# Altium PCB PCB1.PcbDoc
Units mil, origin at the board's own origin, x right, y up, seen from the top; angles counter-clockwise.
Board outline 3020 x 2840 mil, 2 copper layers (Top Layer, Bottom Layer); 55 components, 38 nets, 145 pads, 15 vias.
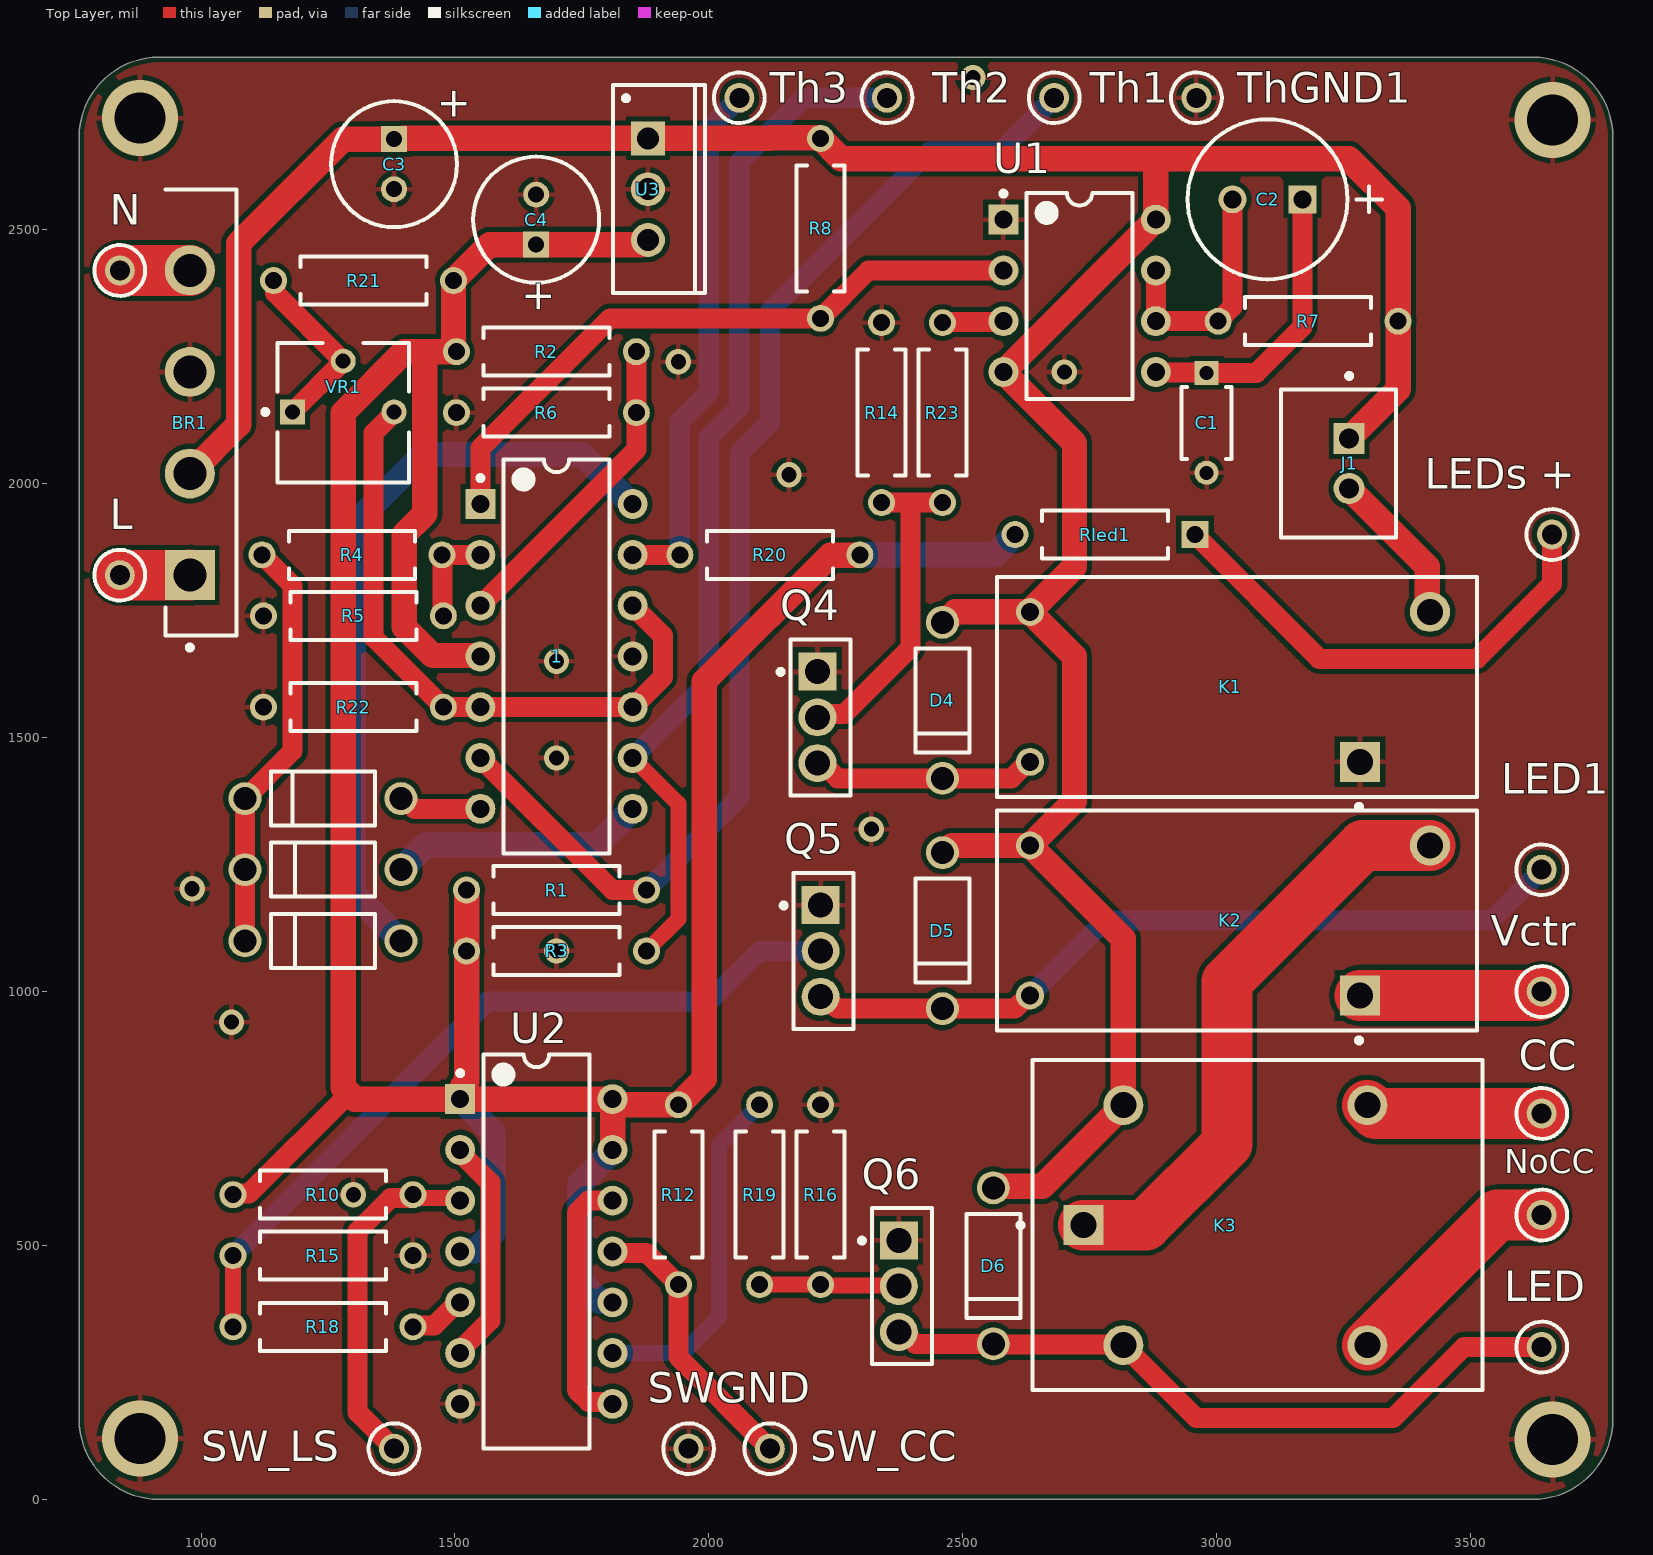
[diagram p0: Top Layer view]
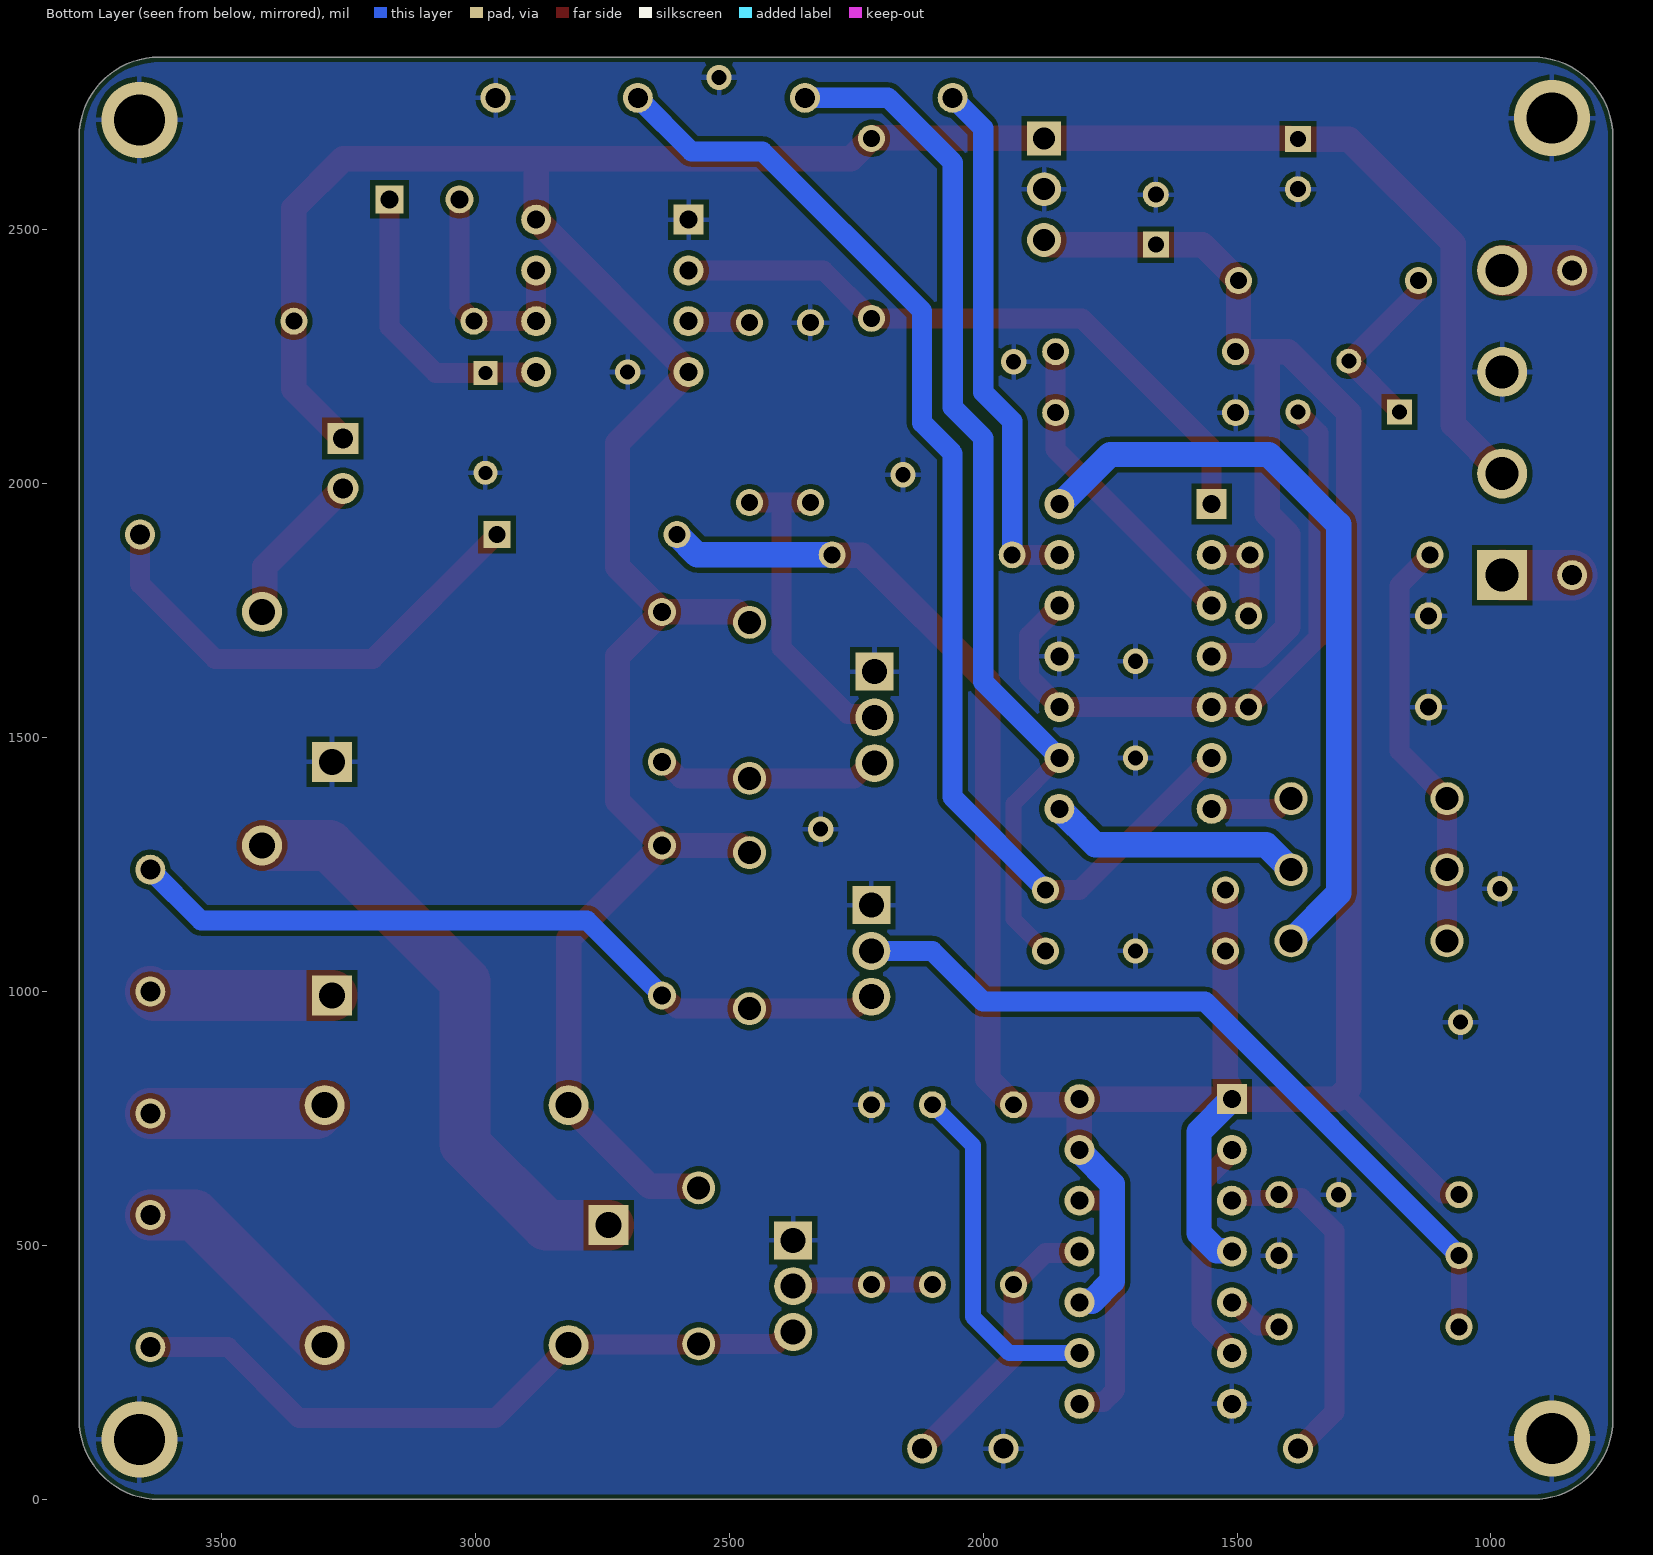
[diagram p1: Bottom Layer view, seen from below]

## Layer stack, top to bottom
Top Solder: solder mask 0.4, Solder Resist, Dk 3.5
Top Layer: signal copper 1.4
Dielectric 1: dielectric 12.6, FR-4, Dk 4.8
Bottom Layer: signal copper 1.4
Bottom Solder: solder mask 0.4, Solder Resist, Dk 3.5

## Board outline
760,157.48 760,2682.52 cw(c917.48,2682.52) 917.48,2840 3622.52,2840 cw(c3622.52,2682.52) 3780,2682.52 3780,157.48 cw(c3622.52,157.48) 3622.52,0 917.48,0 cw(c917.48,157.48)

## Design rules (kind name [scope] priority, off if disabled: settings)
BoardOutlineClearance [All] p1: gap=10 ignorepadtopadclearanceinfootprint=FALSE except(0: Arc-SplitContinuation Track-SplitContinuation SMDPad-SplitContinuation THPad-SplitContinuation Via-SplitContinuation Fill-SplitContinuation Poly-SplitContinuation Region-SplitContinuation Text-SplitContinuation)
Clearance [All] p1: gap=10 ignorepadtopadclearanceinfootprint=TRUE
MinimumSolderMaskSliver [All] p1: minsoldermaskwidth=7.87
PolygonConnect [All] p1: connectstyle=Relief reliefconductorwidth=10 reliefentries=4 polygonreliefangle="90 Angle" airgapwidth=10
RoutingVias [All] p1: holewidth=28 width=50 viastyle="Through Hole" minholewidth=28 minwidth=50 maxholewidth=28 maxwidth=50
SolderMaskExpansion [All] p1: expansion=0 istentingtop=FALSE
SupplyNets "Schematic Supply Nets_3" [InNet('+9~')] p1: voltage=0.000
SupplyNets "Schematic Supply Nets_1" [InNet('GND')] p2: voltage=0.000
SupplyNets "Schematic Supply Nets" [InNet('+5')] p3: voltage=0.000
Width Width_1 [All] p1: maxlimit=196.85 minlimit=5.91 preferedwidth=10 minimp=50.000000 maximp=50.000000 favimp=50.000000
Width [All] p2: maxlimit=10 minlimit=10 preferedwidth=10
29 further rules are at their usual default settings.

## Classes and differential pairs
component class U_Relays: CC D4 D5 D6 J1 K1 K2 K3 LED LED1 "LEDs +" NoCC Q4 Q5 Q6 R14 R15 R16 R18 R19 R23 Rled1 Vctr
component class U_Relay_Latches: R10 R12 SW_CC SW_LS SWGND U2
component class U_Power: BR1 C3 C4 L N U3
component class U_Fan_Control: 1 C1 C2 R1 R2 R3 R4 R5 R6 R7 R8 R20 R21 R22 Th1 Th2 Th3 ThGND1 U1 VR1

## Components (designator, comment, footprint, x,y, rotation, side; value= is the part's Value field where it differs from the comment)
1 "LM324AN" TI-N0014A 1700,1660 r0 top
BR1 "GBU8D" FP-127EL-MFG 1000,2140 r270 top
C1 "RCER71H103K0K1H03B" FP-RCE0K1-MFG 2980,2120 r270 top
C2 "ECA1HM101" CAPPR65-350-1150X800X1250 3100,2560 r180 top value=470µF
C3 "ECA-2AM220" CAPPR55-250-1120X630X1220 1380,2629.21 r270 top value=100µF
C4 "ECA-2AM220" CAPPR55-250-1120X630X1220 1660,2520 r90 top value=100µF
CC "5003" KSTN-5003 3640,760 r0 top
D4 "1N4007" FAIR-DO-41-2 2460,1573.54 r270 top
D5 "1N4007" FAIR-DO-41-2 2460,1120 r270 top
D6 "1N4007" FAIR-DO-41-2 2560,460 r270 top
J1 "Fan" FP-B2B-XH-A_LF_SN-MFG 3240,2040 r270 top
K1 "LKQ1AF-5V-TV-5" FP-LKQ1AF-5V-TV-5-MFG 3040,1600 r180 top
K2 "Load Switch" FP-LKQ1AF-5V-TV-5-MFG 3040,1140 r180 top
K3 "G5LE-14-36 DC12" FP-G5LE-14-36_DC12-MFG 3080,540 r0 top
L "5003" KSTN-5003 840,1820 r90 top
LED "5003" KSTN-5003 3640,300 r180 top
LED1 "5003" KSTN-5003 3640,1240 r90 top
"LEDs +" "5003" KSTN-5003 3660,1900 r90 top
N "5003" KSTN-5003 840,2420 r90 top
NoCC "5003" KSTN-5003 3640,560 r90 top
Q4 "BD139G" FP-77-09-MFG 2220,1540 r0 top
Q5 "BD139G" FP-77-09-MFG 2226.1,1080 r0 top
Q6 "BD139G" FP-77-09-MFG 2380,420 r0 top
R1 "MFR-25FBF52-100R" RESA60-630X240#1 1700,1200 r0 top value=47k
R2 "MFR-25FBF52-100R" RESA60-630X240#1 1680,2260 r0 top value=50k
R3 "MFR-25FBF52-100R" RESA60-630X240#1 1700,1080 r0 top value=47k
R4 "MFR-25FBF52-100R" RESA60-630X240#1 1297.17,1860 r180 top value=1k
R5 "MFR-25FBF52-100R" RESA60-630X240#1 1300,1740 r180 top value=20k
R6 "MFR-25FBF52-100R" RESA60-630X240#1 1680,2140 r180 top value=20k
R7 "MFR-25FBF52-1K" RESA60-630X240#1 3180,2320 r0 top value=20k
R8 "MFR-25FBF52-1K" RESA60-630X240#1 2220,2502.83 r270 top value=10k
R10 "MFR-25FBF52-100R" RESA60-630X240#1 1240,600 r180 top value=4k7
R12 "MFR-25FBF52-100R" RESA60-630X240#1 1940,600 r90 top value=4k7
R14 "MFR-25FBF52-100R" RESA60-630X240#1 2340,2140 r270 top value=4k7
R15 "MFR-25FBF52-100R" RESA60-630X240#1 1240,480 r180 top value=4k7
R16 "MFR-25FBF52-100R" RESA60-630X240#1 2220,600 r270 top value=4k7
R18 "MFR-25FBF52-100R" RESA60-630X240#1 1240,340 r0 top value=330R
R19 "MFR-25FBF52-100R" RESA60-630X240#1 2100,600 r90 top value=330R
R20 "MFR-25FBF52-100R" RESA60-630X240#1 2120,1860 r180 top value=47k
R21 "MFR-25FBF52-100R" RESA60-630X240#1 1320,2400 r180 top value=4k7
R22 "MFR-25FBF52-100R" RESA60-630X240#1 1300,1560 r180 top value=4k7
R23 "MFR-25FBF52-100R" RESA60-630X240#1 2460,2140 r90 top value=330R
Rled1 "MFR-25FBF52-100R" RESA60-630X240#2 2780,1900 r180 top value=4k7
SW_CC "5003" KSTN-5003 2120,100 r90 top
SW_LS "5003" KSTN-5003 1380,100 r90 top
SWGND "5003" KSTN-5003 1960,100 r0 top
Th1 "5003" KSTN-5003 2680,2760 r180 top
Th2 "5003" KSTN-5003 2350.74,2760 r180 top
Th3 "5003" KSTN-5003 2060,2760 r180 top
ThGND1 "5003" KSTN-5003 2960,2760 r270 top
U1 "LM555CN" N08E 2730,2370 r0 top
U2 "CD74AC74E" N0014A 1660.35,488.18 r0 top
U3 "L7805CV" TO220 1880,2580 r270 top
Vctr "5003" KSTN-5003 3640,1000 r90 top
VR1 "3362P-1-104LF" BOUR-3362P 1280,2140 r0 top

## Footprints (in the part's own frame and the unit in brackets; to place one, negate y for a bottom-side part, rotate by r counter-clockwise, add the part's x,y. Pads: shape width x height; smd on the part's side, far side on the other; paste and mask are expansions set on the pad)
BOUR-3362P [mm] "THD, 3-Leads, Body 6.6x6.99mm, Pitch 2.54mm"
  rect 1.25x1.25 hole 0.75: 1(-2.54,0.035)
  round 1.25 hole 0.75: 2(0,2.575) 3(2.54,0.035)
  silkscreen extent -4.02,-3.49 3.3,3.5, body extent -3.3,-3.49 3.3,3.5, height 4.5
CAPPR55-250-1120X630X1220 [mm] "THD, 2-Leads, Dia 6.3mm, Pin Spacing 2.5mm"
  rect 1.3x1.3 hole 0.8: 1(-1.25,0)
  round 1.3 hole 0.8: 2(1.25,0)
  silkscreen extent -3.15,-3.15 3.15,3.15, body extent -3.15,-3.15 3.16,3.15, height 12.21
CAPPR65-350-1150X800X1250 [mm] "THD, 2-Leads, Dia 8mm, Pin Spacing 3.5mm"
  rect 1.4x1.4 hole 0.9: 1(-1.75,0)
  round 1.4 hole 0.9: 2(1.75,0)
  silkscreen extent -5.72,-4 4,4, body extent -4,-4 3.95,4, height 12.5
FAIR-DO-41-2 [mm] "THD, 2-Leads, Body 5.2x2.72mm, Pin Spacing 7.8mm"
  round 1.65 hole 1.15: 1(-3.9,0) 2(3.9,0)
  silkscreen extent -2.6,-1.35 2.6,1.35, body extent -4.29,-1.17 4.29,1.17, height 2.35
FP-77-09-MFG [mm]
  rect 1.9x1.9 hole 1.25 paste-2539.97 mask+0: 1(-0.155,2.29)
  round 1.9 hole 1.25 paste-2539.97 mask+0: 2(-0.155,0) 3(-0.155,-2.29)
  silkscreen extent -2.12,-3.9 1.5,3.9, body extent -1.6,-4 1.6,4, height 0.25
FP-127EL-MFG [mm]
  rect 2.5x2.5 hole 1.65 paste-2539.97 mask+0: 1(8.125,-0.562)
  round 2.5 hole 1.65 paste-2539.97 mask+0: 2(3.045,-0.563) 3(-2.035,-0.563) 4(-7.115,-0.563)
  silkscreen extent -11.15,-1.78 11.87,1.78, body extent -11.25,-1.91 11.25,1.88, height 0.25
FP-B2B-XH-A_LF_SN-MFG [mm]
  rect 1.55x1.55 hole 1 paste-2539.97 mask+0: 1(-1.25,0.525)
  round 1.55 hole 1 paste-2539.97 mask+0: 2(1.25,0.525)
  silkscreen extent -4.5,-2.88 3.7,2.88, body extent -3.8,-2.98 3.8,2.98, height 0.25
FP-G5LE-14-36_DC12-MFG [mm]
  rect 2x2 hole 1.3 paste-2539.97 mask+0: 1(-8.7,0)
  round 2 hole 1.3 paste-2539.97 mask+0: 2(-6.7,-6) 3(5.5,-6) 4(5.5,6) 5(-6.7,6)
  silkscreen extent -11.97,-8.25 11.25,8.25, body extent -11.35,-8.35 11.35,8.35, height 0.25
FP-LKQ1AF-5V-TV-5-MFG [mm]
  rect 2x2 hole 1.3 paste-2539.97 mask+0: 1(-6.15,3.75)
  round 1.4 hole 0.9 paste-2539.97 mask+0: 2(10.35,3.75) 4(10.35,-3.75)
  round 2 hole 1.3 paste-2539.97 mask+0: 3(-9.65,-3.75)
  silkscreen extent -12,-5.5 12,6.12, body extent -12.1,-5.6 12.1,5.6, height 0.25
FP-RCE0K1-MFG [mm]
  rect 1.2x1.2 hole 0.7 paste-2539.97 mask+0: 1(-2.5,0)
  round 1.2 hole 0.7 paste-2539.97 mask+0: 2(2.5,0)
  silkscreen extent -1.8,-1.25 1.8,1.25, body extent -3.2,-1.35 3.2,1.35, height 0.25
KSTN-5003 [mm] "Test Point, Through Hole, Dia 2.54mm"
  round 1.5 hole 1: 1(0,0)
  silkscreen extent -1.27,-1.27 1.27,1.27, body extent -1.27,-1.27 1.27,1.27, height 4.57
N08E [mm] "DIP, 8-Pin, Row Spacing 7.62 mm, Pitch 2.54 mm"
  rect 1.5x1.5 hole 0.9: 1(-3.81,3.81)
  round 1.5 hole 0.9: 2(-3.81,1.27) 3(-3.81,-1.27) 4(-3.81,-3.81) 5(3.81,-3.81) 6(3.81,-1.27) 7(3.81,1.27) 8(3.81,3.81)
  silkscreen extent -3.93,-5.15 2.65,5.23, body extent -3.6,-5.15 3.6,5.15, height 5.33
N0014A [mm] "DIP, 14-Leads, Body 19.7x6.6mm, Pitch 2.54mm"
  rect 1.5x1.5 hole 0.9: 1(-3.81,7.62)
  round 1.5 hole 0.9: 2(-3.81,5.08) 3(-3.81,2.54) 4(-3.81,0) 5(-3.81,-2.54) 6(-3.81,-5.08) 7(-3.81,-7.62) 8(3.81,-7.62) 9(3.81,-5.08) 10(3.81,-2.54) 11(3.81,0) 12(3.81,2.54) 13(3.81,5.08) 14(3.81,7.62)
  silkscreen extent -3.93,-9.85 2.65,9.85, body extent -3.95,-9.85 3.95,9.85, height 5.08
RESA60-630X240#1 [mm] "Axial Resistor, 2-Leads, Dia 2.4mm, Body Length 6.3mm"
  round 1.35 hole 0.85: 1(-4.5,0) 2(4.5,0)
  silkscreen extent -3.15,-1.2 3.15,1.2, body extent -4.77,-1.19 4.77,1.2, height 2.4
RESA60-630X240#2 [mm] "Axial Resistor, 2-Leads, Dia 2.4mm, Body Length 6.3mm"
  rect 1.35x1.35 hole 0.85: 1(-4.5,0)
  round 1.35 hole 0.85: 2(4.5,0)
  silkscreen extent -3.15,-1.2 3.15,1.2, body extent -4.77,-1.19 4.77,1.2, height 2.4
TI-N0014A [mm] "DIP, 14-Leads, Body 19.7x6.6mm, Pitch 2.54mm"
  rect 1.5x1.5 hole 0.9: 1(-3.81,7.62)
  round 1.5 hole 0.9: 2(-3.81,5.08) 3(-3.81,2.54) 4(-3.81,0) 5(-3.81,-2.54) 6(-3.81,-5.08) 7(-3.81,-7.62) 8(3.81,-7.62) 9(3.81,-5.08) 10(3.81,-2.54) 11(3.81,0) 12(3.81,2.54) 13(3.81,5.08) 14(3.81,7.62)
  silkscreen extent -3.93,-9.85 2.65,9.85, body extent -3.95,-9.85 3.95,9.85, height 5.08
TO220 [mm] "TO, Thru-Hole, Vertical, Heatsink Mounted; 3 In-Line Leads; Pitch 2.54 mm"
  rect 1.7x1.7 hole 1.1: 1(-2.54,0)
  round 1.7 hole 1.1: 2(0,0) 3(2.54,0)
  silkscreen extent -5.2,-1.75 5.2,2.85, body extent -5.25,-1.8 5.25,2.9, height 19.7

## Part data
1: library part CMP-014-00016-2, "Quadruple Operational Amplifier, 1.2 MHz, 0 to 70 degC, 14-Pin PDIP (N), Pb-Free (RoHS), Tube", Case/Package=DIP, Manufacturer="Texas Instruments (TI)", Max Dual Supply Voltage=16V, Max Operating Temperature=70°C, Min Dual Supply Voltage=1.5V, Min Operating Temperature=0°C, Nominal Dual Supply Voltage=12V, Nominal Supply Current=3mA, Nominal Voltage Gain=100dB, Output Current=30mA, Package Description="14-Pin Double In-line Package, Body 19.305 x 6.35 mm, Pitch 2.54 mm", Package Quantity=25, Package Reference=N-14, Datasheet URL=http://www.ti.com/lit/ds/symlink/lm324a.pdf, Datasheet Version="SLOS066W, 03/2015", Manufacturer URL=http://www.ti.com/, Max Supply Voltage=16V, Min Supply Voltage=1.5V, Mounting Technology=TH, Nominal Supply Voltage=12V, Package URL=http://www.ti.com/lit/ml/mpdi002c/mpdi002c.pdf, Pins=14, RoHS Compliant=True, Unity Gain Bandwidth Product=1.2MHz
BR1: library part CMP-00278-84328822-1, "GBU8D Diode Rectifier Bridge Single 200V 8A 4-Pin Case GBU Rail", Average Rectified Current=8A, Case/Package=SIP, Forward Voltage=1V, Manufacturer Lifecycle Status=ACTIVE, Max Forward Surge Current (Ifsm)=200A, Max Junction Temperature (Tj)=150°C, Max Repetitive Reverse Voltage (Vrrm)=200V, Max Reverse Leakage Current=50µA, Min Operating Temperature=-55°C, Peak Reverse Current=5µA, Power Dissipation=16W, Contact Plating=Tin, Current Rating=8A, Element Configuration=Single, Forward Current=8A, Height=18.8mm, Lead Free="Lead Free", Length=22.3mm, Lifecycle Status=Production, Max Operating Temperature=150°C, Max Surge Current=200A, Mount="Through Hole", NexarPartId=84328822, Number of Elements=1, Number of Pins=4, Output Current=8A, Peak Non-Repetitive Surge Current=200A, Radiation Hardening=No, REACH SVHC="No SVHC", Reverse Voltage=200V, RoHS=Compliant, Schedule B=8541100080, Voltage Rating (DC)=200V, Weight=5.4g, Width=3.56mm
C1: library part CMP-06035-044411-1, "Cap Ceramic 10nF 50V X7R ±10% Radial 5mm +125°C Automotive Bulk", Capacitance=10nF, Case/Package=Radial, Dielectric=X7R, Max Operating Temperature=125°C, Min Operating Temperature=-55°C, Package Quantity=500, Ratings=AEC-Q200, Resistor Type=Ceramic, Tolerance=10%, Voltage Rating=50V, Height=3.5mm, Height - Seated (Max)=0.138inch, Lead Diameter=0.5mm, Lead Free="Lead Free", Lead Pitch=0.197inch, Lead/Base Style="Formed Leads", Length=0.142inch, Mount="Through Hole", Packaging=Bulk, Termination=Radial, Voltage Rating (DC)=50V, Width=0.098inch
C2: library part CMP-001-00026-7, "Aluminum Electrolytic Capacitor, 100 uF, +/- 20%, 50 V, -40 to 85 degC, 2-Pin THD, RoHS, Bulk", Capacitor Type=Electrolytic, Case/Package=Radial, Manufacturer=Panasonic, Max Operating Temperature=85°C, Min Operating Temperature=-40°C, Package Description="2-Pin Radial Lead, Dia 8 mm, Height 12.5 mm", Package Quantity=200, Package Reference=CAPPR65-350-1150X800X1250, Ripple Current=250mA, Tolerance=20%, Voltage Rating=50V, Datasheet URL=https://industrial.panasonic.com/cdbs/www-data/pdf/RDF0000/ABA0000C1218.pdf, Datasheet Version="Rev. 05, 10/2016", Diameter=8mm, Lead Pitch=3.5mm, Manufacturer URL=http://www.panasonic.com/, Mounting Technology=TH, Packaging=Bulk, Pins=2, Ripple Current (AC)=250mA, RoHS Compliant=True
C3 C4: library part CMP-001-00035-7, "Aluminum Electrolytic Capacitor, 22 uF, +/- 20%, 100 V, -40 to 85 degC, 2-Pin THD, RoHS, Bulk", Capacitor Type=Electrolytic, Case/Package=Radial, Manufacturer=Panasonic, Max Operating Temperature=85°C, Min Operating Temperature=-40°C, Package Description="2-Pin Radial Lead, Dia 6.3 mm, Height 12.2 mm", Package Quantity=200, Package Reference=CAPPR55-250-1120X630X1220, Ripple Current=115mA, Tolerance=20%, Voltage Rating=100V, Datasheet URL=https://industrial.panasonic.com/cdbs/www-data/pdf/RDF0000/ABA0000C1047.pdf, Datasheet Version=Mar-16, Diameter=6.3mm, Lead Pitch=2.5mm, Manufacturer URL=http://www.panasonic.com/, Mounting Technology=TH, Packaging=Bulk, Pins=2, Ripple Current (AC)=115mA, RoHS Compliant=True
CC L LED LED1 "LEDs +" N NoCC SW_CC SW_LS SWGND Th1 Th2 Th3 ThGND1 Vctr: library part CMP-002-00037-2, "Test Point, Orange, Height 4.6 mm, Tail Length 3 mm, 1-Pin THD, RoHS", Colour=Orange, Manufacturer=Keystone, Package Description="1-Pin Through Hole Device, Dia 2.54 mm", Package Quantity=10, Case/Package=5003, Connector Type=TestPoint, Contact Material=Bronze, Contact Plating=Tin, Datasheet URL=http://keyelco.com/userAssets/file/M65p56.pdf, Datasheet Version=Jun-15, Diameter=2.54mm, Manufacturer URL=http://www.keyelco.com/, Mounting Technology=TH, Package Reference=5003, Packaging=Bulk, Pins=1, RoHS Compliant=True
D4 D5 D6: library part CMP-004-00007-2, "General Purpose Rectifier, 1.1 V, 1.0 A, -55 to 175 degC, 2-Pin DO-41, RoHS, Tape and Reel", Case/Package=DO-41-2, Forward Current=1A, Forward Voltage=1.1V, Manufacturer=Fairchild, Max Operating Temperature=175°C, Max Surge Current=30A, Min Operating Temperature=-55°C, Package Description="2-Pin Axial Lead, Dia 2.375 mm, Body Length 4.63 mm", Package Quantity=5000, Package Version="Rev. 2, 09/2008", Peak Reverse Current=5uA, Datasheet URL=https://www.fairchildsemi.com/datasheets/1N/1N4007.pdf, Datasheet Version="Rev. 1.1.0, 11/2014", Elements=1, Manufacturer URL=https://www.fairchildsemi.com/, Mounting Technology=TH, Package Reference=DO-41-2, Package URL=http://www.fairchildsemi.com/dwg/DO/DO41A.pdf, Packaging=TapeandReel, Pins=2, RoHS Compliant=True
J1: library part CMP-2000-05888-3, "CONN HEADER VERT 2POS 2.5MM", Color=Natural, Contact Resistance=20mR, Current Rating=3A, Housing Color=White, Insulation Resistance=1GR, Max Operating Temperature=85°C, Max Voltage Rating (AC)=250V, Min Operating Temperature=-25°C, Connector Type="Male Pin", Contact Material=Brass, Contact Plating=Tin, Contact Type="Male Pin", Depth=5.75mm, Fastening Type=Detent, Housing Material=Polyamide, Lead Free="Lead Free", Lead Pitch=2.5mm, Length=7.4mm, Max Current Rating=3A, Max Voltage Rating (DC)=250V, Mount="Through Hole", Number of Contacts=2, Number of Positions=2, Number of Rows=1, Orientation=Straight, Packaging=Bulk, Pitch=2.5mm, REACH SVHC="No SVHC", Series=XH, Termination=Solder, Voltage Rating=250V, Voltage Rating (AC)=250V, Wire/Cable Gauge=22AWG
K1 K2: library part CMP-008-00006-1, "Quiet Type, High Sensitivity 250MW, Slim Power Relay"
K3: library part CMP-08822-000072-1, "RELAY GEN PURPOSE SPDT 10A 12V", Coil Current=30mA, Coil Power=360mW, Coil Resistance=400R, Coil Voltage (DC)=12V, Contact Current Rating=10A, Max Operating Temperature=85°C, Max Voltage Rating (AC)=250V, Max Voltage Rating (DC)=125V, Min Operating Temperature=-25°C, Package Quantity=100, Coil Type=Non-Latching, Contact Material=Tin, Mount="Through Hole", Number of Pins=5, Operate Time=10ms, Packaging=Tray, Radiation Hardening=No, Relay Type="General Purpose", Release Time=5ms, Series=G5LE, Termination="PC Pin", Throw Configuration=SPDT
Q4 Q5 Q6: library part CMP-013-00034-1, "1.5 A, 80 V NPN Power Bipolar Junction Transistor. ONSSPCTRNSTLT1T0R;", Case/Package=TO-225, Max Operating Temperature=150°C, Min Operating Temperature=-55°C, Pins=3
R1 R2 R3 R4 R5 R6 R10 R12 R14 R15 R16 R18 R19 R20 R21 R22 R23 Rled1: library part CMP-009-00046-4, "Axial Resistor, 100 Ohm, +/- 1%, 0.25 W, -55 to 155 degC, 2-Pin THD, RoHS, Bulk", Case/Package=Axial, Manufacturer=Yageo, Max Operating Temperature=155°C, Min Operating Temperature=-55°C, Package Description="2-Pin Axial Lead, Dia 2.4 mm, Body Length 6.3 mm", Package Quantity=200, Package Reference=MFR-25, Power=250mW, Tolerance=1%, Voltage Rating=250V, Composition=CarbonFilm, Datasheet URL=http://www.yageo.com/documents/recent/Yageo%20LR_MFR_2013.pdf, Datasheet Version=Apr-13, Manufacturer URL=http://www.yageo.com/, Mounting Technology=TH, Packaging=Bulk, RoHS Compliant=True
R7 R8: library part CMP-009-00048-4, "Axial Resistor, 1 KOhm, +/- 1%, 250 mW, -55 to 155 degC, 2-Pin THD, RoHS, Bulk", Case/Package=Axial, Manufacturer=Yageo, Max Operating Temperature=155°C, Min Operating Temperature=-55°C, Package Description="2-Pin Axial Lead, Dia 2.4 mm, Body Length 6.3 mm", Package Quantity=200, Package Reference=MFR-25, Power=250mW, Tolerance=1%, Voltage Rating=250V, Composition=CarbonFilm, Datasheet URL=http://www.yageo.com/documents/recent/Yageo%20LR_MFR_2013.pdf, Datasheet Version=Apr-13, Manufacturer URL=http://www.yageo.com/, Mounting Technology=TH, Packaging=Bulk, RoHS Compliant=True
U1: library part CMP-0056-00017-2, "Timer, 8-pin MDIP", Manufacturer="National Semiconductor", PackageTopMarking=NSUZXYTTE#*LM*555CN, PowerWise=N, Code_JEDEC=MS-001-BA, ComponentLink1Description="LM555 Datasheet", ComponentLink1URL=http://www.national.com/ds/LM/LM555.pdf, ComponentLink2Description="LM555 Web Page", ComponentLink2URL=http://www.national.com/pf/LM/LM555.html, ComponentLink3Description="N08E Package Page", ComponentLink3URL=http://www.national.com/packaging/folders/n08e.html, CompType="Analog IC", DatasheetVersion=Jul-2006, PackageDescription="MDIP, .365 x .250 x .130in, 8 Lead, .100in Pitch", PackageReference=N08E, PackageVersion="revG, May-2006", PinCount=8, RevisionNote="Component URLs added", RoHS=N
U2: library part CMP-1619-00741-2, "Dual Positive-Edge-Triggered D-Type Flip-Flops with Set and Reset, N0014A, TUBE", F @ Nom Voltage(Max)(Mhz)=100, Generic Part Number=CD74AC74, ICC @ Nom Voltage(Max)(mA)=0.04, Manufacturer="Texas Instruments", Operating Temperature Range(C)="-55 to 125", Rating=Catalog, tpd @ Nom Voltage(Max)(ns)=114,12.7,9.1, Voltage(Nom)(V)=1.5,3.3,5, 3-State Output=No, Bits(#)=2, Code_JEDEC=MS-001, DatasheetVersion=SCHS231D, Input Type=CMOS, Output Drive (IOL/IOH)(Max)(mA)=24/-24, Output Logic=Inverted,Non-inverted, Output Type=CMOS, PackageReference=N0014A, Schmitt Trigger=No, Technology Family=AC, VCC(Max)(V)=5.5, VCC(Min)(V)=1.5
U3: library part CMP-0244-00483-1, "Positive Voltage Regulator, 5V, 3-Pin TO-220", ComponentLink1Description="Manufacturer URL", ComponentLink1URL=http://www.st.com, ComponentLink2Description=Datasheet, ComponentLink2URL=http://www.st.com/internet/com/TECHNICAL_RESOURCES/TECHNICAL_LITERATURE/DATASHEET/CD00000444.pdf, ComponentLink3Description="Package Specification", ComponentLink3URL=http://www.st.com/internet/com/TECHNICAL_RESOURCES/TECHNICAL_LITERATURE/PACKAGE_INFORMATION/CD00004649.pdf, DatasheetVersion=16/11/2011, PackageDescription="TO, Thru-Hole, Vertical, Heatsink Mounted; 3 In-Line Leads; Pitch 2.54 mm", PackageReference=TO220, PackageVersion=ver3.0
VR1: library part CMP-009-00040-2, "Square Trimpot(R) Trimming Potentiometer, 100 KOhm, 300 V, -55 to 125 degC, 3-Pin THD, RoHS, Tube", Case/Package=3326P, Manufacturer=Bourns, Max Operating Temperature=125°C, Min Operating Temperature=-55°C, Package Description="3-Pin Through Hole Device, Body 6.6 x 6.99 mm, Pitch 2.54 mm", Package Quantity=250, Power=500mW, Resistance=100k, Tolerance=10%, Voltage Rating=300V, Composition=Potentiometer, Datasheet URL=http://www.bourns.com/docs/Product-Datasheets/3362.pdf, Datasheet Version=May-16, Lead Pitch=2.54mm, Manufacturer URL=http://www.bourns.com/, Mounting Technology=TH, Package Reference=3326P, Packaging=Rail/Tube, RoHS Compliant=True

## Free pads (board coordinates)
  round 64.96 hole 45.28: 1(1086.46,1100) 1(1086.46,1240) 1(1086.46,1380) 2(1393.54,1100) 2(1393.54,1380) 2(1393.54,1240)

## Via types
v1: diameter 50, hole 30, Top Layer to Bottom Layer, tented both sides, 11 vias
v2: diameter 150, hole 100, Top Layer to Bottom Layer, 4 vias

## Nets (pads, with @x,y where several pads share a name; then routed paths per layer and width w, separated by ;. In a path a pad name is that pad's centre, name@x,y a point inside that pad or via, vN(x,y) a via of type N, cw(c..) or ccw(c..) an arc to the next point about the centre after c; other vN are vias at no path point)
1DQ: U2.2 U2.6 | length 449.1
  Top Layer w39.37: U2.6 1510.35,293.51 1569.57,352.72 1569.57,623.64 1510.35,682.86 U2.2
2DQ: U2.8 U2.12 | length 511.5
  Top Layer w39.37: U2.8 1806.59,191.95 1763.06,191.95 1740,215.01 1740,565.12 1763.06,588.18 U2.12
+5: 1.4 C4.1 R1.1 R2.1 R3.1 R10.2 R12.2 R20.1 R21.1 Rled1.2 U2.1 U2.4 U2.10 U2.13 U2.14 U3.3 | length 6692.8
  Top Layer w39.37: R10.2 1065.47,602.64 1094.77,602.64 1291.58,799.45
  Top Layer w50: 1440.49,2248.78 1440.49,1940.49 1400,1900 1400,1717.71 1455.98,1661.73 1545.82,1661.73 1.4@1547.55,1660 ; R1.1 R3.1 1522.83,822 1514.88,814.05 1514.88,792.71 U2.1 ; U2.13 U2.14@1810.35,777.17 ; U3.3 1875.42,2480 1866.21,2470.79 1567.95,2470.79 R21.1 1497.17,2266.52 1502.83,2260.85 R2.1 1440.49,2260 1400,2260 1280.32,2140.31 1280.32,810.71 1302.84,788.18 U2.1 ; R12.2 1823.82,777.17 1812.8,788.18 U2.1 ; R12.2@1940.43,778.19 1941.03,778.19 1990.75,827.91 1990.75,1610.75 2238.97,1858.98 2296.14,1858.98 R20.1
  Bottom Layer w50: U2.4 1512.09,489.92 1540.28,489.92 1574.88,524.52 1574.88,723.66 U2.1 ; U2.10 1808.62,389.92 1785.64,389.92 1745.83,429.73 1745.83,621.21 1810.35,685.73 U2.13 ; R20.1 2562.83,1860 Rled1.2
+9~: BR1.2 C3.1 D4.1 D5.1 D6.1 J1.1 K1.4 K2.4 K3.5 R7.2 R8.1 U1.4 U1.8 U3.1 | length 6324.9
  Top Layer w50: BR1.2 1074.02,2116.28 1074.02,2473.03 1279.41,2678.43 C3.1 ; C3.1@1380.59,2679.02 1396.42,2679.02 1397.4,2680 U3.1 2119.99,2680 2121.56,2681.57 2218.43,2681.57 2260,2640 2880,2640 ; D5.1 2464.05,1273.54 2478.14,1287.64 K2.4@2631.13,1287.64 ; D4.1 2464.05,1727.09 2484.6,1747.64 K1.4 ; D6.1 2562.86,616.41 2656.41,616.41 K3.5 2816.22,1103.94 K2.4 2720,1375.12 2720,1660.16 K1.4 ; J1.1 3357.17,2185.71 R7.2 3357.17,2542.83 3260,2640 2880,2640 ; K1.4 2632.52,1749.02 2720,1836.5 2720,2080 U1.4 U1.8 2880,2640
"Ain+/timer out": R23.2 U1.3 | length 121.2
  Top Layer w39.37: R23.2 2461.42,2318.58 2578.58,2318.58 U1.3
"CC/NoCC base": R19.2 U2.9 | length 689.7
  Bottom Layer w31.5: U2.9 1948.18,288.18 2020,360 2020,697.17 R19.2
GND: 1.11 BR1.3 C1.2 C3.2 C4.2 K1.1 Q4.1 Q5.1 Q6.1 R5.2 R6.2 R14.1 R15.1 R16.1 R22.2 SWGND.1 ThGND1.1 U1.1 U2.7 U3.2
  other v1: 1300,600 1060,940 1700,1080 982.31,1202.31 2320,1320 1700,1460 1700,1650.34 2157.69,2017.69 2700,2220 1940,2240 2520,2800
  other v2: 3661.42,118.11 880,120 3661.42,2716.54 880,2720
LSbase: R18.2 U2.5 | length 113.1
  Top Layer w39.37: R18.2 1419.8,342.64 1459.48,342.64 1505.03,388.18 U2.5
Net1_1: 1.1 R8.2 U1.2 | length 1281.2
  Top Layer w39.37: 1.1 1550,2070 1805.67,2325.67 R8.2@2216.27,2325.67 ; R8.2 2314.33,2420 U1.2
Net1_2: 1.2 R4.1 R5.1 | length 196.8
  Top Layer w39.37: R5.1 1475.75,1741.42 1475.75,1858.58 R4.1 1.2
Net1_3: 1.3 R2.2 R6.1 | length 627.2
  Top Layer w39.37: 1.3 1857.17,2067.17 R2.2
Net1_6: 1.6 R1.2 Th1.1 | length 2409.4
  Top Layer w39.37: 1.6 1810,1200 R1.2
  Bottom Layer w39.37: R1.2 2060,1382.83 2060,2060 2120,2120 2120,2340 2434.26,2654.26 2574.26,2654.26 Th1.1
Net1_7: 1.7 pad.2@1393.54,1380 | length 164.7
  Top Layer w39.37: pad.2@1393.54,1380 1400.47,1380 1420.47,1360 1.7
Net1_8: 1.8 pad.2@1393.54,1240 | length 502.1
  Bottom Layer w50: pad.2@1396.41,1242.86 1442.52,1288.97 1778.97,1288.97 1.8
Net1_9: 1.9 R3.2 Th2.1 | length 2046.5
  Top Layer w31.5: 1.9 1940,1370 1940,1142.83 R3.2
  Bottom Layer w40: 1.9 2000,1610 2000,2090.27 2060,2150.27 2060,2632.74 2187.26,2760 Th2.1
Net1_13: 1.13 R20.2 Th3.1 | length 1041.4
  Top Layer w39.37: 1.13 R20.2
  Bottom Layer w40: R20.2 1942.83,2122.83 2000,2180 2000,2700 Th3.1
Net1_14: 1.14 pad.2@1393.54,1100 | length 1506.2
  Bottom Layer w50: pad.2@1393.54,1100 1300,1193.54 1300,1920 1437.64,2057.64 1749.91,2057.64 1847.55,1960 1.14
NetBR1_1: BR1.1 L.1 | length 137.9
  Top Layer w100: L.1 977.74,1820 BR1.1
NetBR1_4: BR1.4 N.1 | length 137.9
  Top Layer w100: N.1 977.74,2420 BR1.4
NetC1_1: C1.1 C2.1 U1.5 | length 578.1
  Top Layer w39.37: U1.5 2880.79,2219.21 2979.21,2219.21 C1.1 3078.43,2218.43 3168.9,2308.9 C2.1
NetCC_1: CC.1 K3.4 | length 350.2
  Top Layer w100: K3.4 3312.76,760 CC.1
NetD1_1: pad.1 R4.2 | length 830.5
  Top Layer w39.37: pad.1@1086.46,1100 1086.46,1240 pad.1@1086.46,1386.92 ; pad.1@1086.46,1380 1180,1473.54 1180,1800 R4.2
NetD4_2: D4.2 K1.2 Q4.3 | length 444.4
  Top Layer w39.37: Q4.3 2223.49,1449.84 2253.33,1420 D4.2 2595.9,1420 2628.26,1452.36 K1.2
NetD5_2: D5.2 K2.2 LED1.1 Q5.3 | length 1543
  Top Layer w39.37: Q5.3 2229.59,989.84 2252.97,966.46 2602.35,966.46 2628.26,992.36 K2.2
  Bottom Layer w39.37: K2.2 2780.16,1140 3540,1140 LED1.1
NetD6_2: D6.2 K3.2 LED.1 Q6.3 | length 1394.4
  Top Layer w39.37: Q6.3 2383.49,329.84 2406.87,306.46 D6.2 2561.34,305.12 2814.88,305.12 K3.2 2960,160 3347.05,160 3487.05,300 LED.1
NetJ1_2: J1.2 K1.3 | length 309.1
  Top Layer w50: J1.2 3414.42,1837.03 3414.42,1753.14 K1.3
NetK2_1: K2.1 Vctr.1 | length 361
  Top Layer w100: K2.1 3632.36,992.36 Vctr.1
NetK2_3: K2.3 K3.1 | length 1179.6
  Top Layer w100: K3.1 2860,540 3020,700 3020,1020 3287.64,1287.64 K2.3
NetK3_3: K3.3 NoCC.1 | length 449.6
  Top Layer w100: K3.3 3552.76,560 NoCC.1
"NetLEDs +_1": "LEDs +.1" Rled1.1 | length 962.4
  Top Layer w39.37: Rled1.1 3201.85,1655.31 3512.44,1655.31 3660,1802.87 3660,1900
NetQ4_2: Q4.2 R14.2 R23.1 | length 645.5
  Top Layer w39.37: Q4.2 2220.68,1546.78 2266.78,1546.78 2396.67,1676.67 2396.67,1962.83 ; R14.2 2396.67,1962.83 ; R23.1 2453.11,1962.83 2396.67,1962.83
NetQ5_2: Q5.2 R15.2 R18.1 | length 1545.7
  Top Layer w31.5: R18.1 R15.2
  Bottom Layer w39.37: R15.2 1562.83,980 2000,980 2100,1080 Q5.2
NetQ6_2: Q6.2 R16.2 R19.1 | length 275.1
  Top Layer w31.5: R19.1 R16.2 2221.42,421.42 2372.48,421.42 Q6.2
NetR10_1: R10.1 SW_LS.1 U2.3 | length 694.5
  Top Layer w31.5: R10.1 1423.71,593.46 1505.08,593.46 U2.3
  Top Layer w39.37: SW_LS.1 1308.47,171.53 1308.47,528.47 1373.11,593.11 1410.28,593.11 R10.1
NetR12_1: R12.1 SW_CC.1 U2.11 | length 554.1
  Top Layer w39.37: U2.11 1813.13,485.4 1877.43,485.4 R12.1 1940,280 SW_CC.1
NetR21_2: R21.2 VR1.1 VR1.2 | length 356.9
  Top Layer w39.37: R21.2 1145.47,2397.36 1145.47,2375.91 VR1.2 VR1.1
ThermRef: 1.5 1.10 1.12 R22.1 VR1.3 | length 1271.5
  Top Layer w39.37: VR1.3@1380,2140 1340,2100 1340,1697.17 R22.1@1474.53,1562.64 ; R22.1 1.5 1.10 1909.21,1619.21 1909.21,1700.79 1.12
THR-DIS: C2.2 R7.1 U1.6 U1.7 | length 474.5
  Top Layer w39.37: U1.7 U1.6 R7.1 3031.1,2348.27 C2.2

## Polygon pours and split planes (outlines as drawn)
GND on Bottom Layer "NONET_L-01_P-001" (solid, remove dead copper, pour order 1): 360,2840 360,0 4140,0 4140,2840
GND on Top Layer "NONET_L-01_P-001" (solid, remove dead copper, pour order 0): 360,2840 360,0 4140,0 4140,2840

## Silkscreen, mask and mechanical layers (free items; w line width, h text height)
Top Overlay:
  lines w7.87: 1180,1326.85 1180,1340 ; 1180,1433.15 1180,1406.57 1180,1340 ; 1185,1046.85 1185,1153.15 ; 1185,1186.85 1185,1293.15 ; 1180,1340 1180,1340 ; 1137.64,1046.85 1137.64,1153.15 1342.36,1153.15 1342.36,1046.85 1137.64,1046.85 ; 1137.64,1186.85 1137.64,1293.15 1342.36,1293.15 1342.36,1186.85 1137.64,1186.85 ; 1137.64,1326.85 1137.64,1433.15 1342.36,1433.15 1342.36,1326.85 1137.64,1326.85
Mechanical 1:
  the board outline again, w10
Top 3D Body:
  lines w3.94: 1147.48,1053.77 1147.48,1146.24 1332.52,1146.24 1332.52,1053.77 1147.48,1053.77 ; 1147.48,1193.77 1147.48,1286.24 1332.52,1286.24 1332.52,1193.77 1147.48,1193.77 ; 1147.48,1333.77 1332.52,1333.77 1332.52,1426.24 1147.48,1426.24 1147.48,1333.77
Top Courtyard:
  lines w1.97: 1050.04,1042.91 1050.04,1157.09 1429.96,1157.09 1429.96,1042.91 1050.04,1042.91 ; 1050.04,1182.91 1050.04,1297.09 1429.96,1297.09 1429.96,1182.91 1050.04,1182.91 ; 1050.04,1322.91 1050.04,1437.09 1429.96,1437.09 1429.96,1322.91 1050.04,1322.91
  lines w3.94: 1220.32,1100 1259.68,1100 ; 1220.32,1240 1259.68,1240 ; 1220.32,1380 1259.68,1380 ; 1240,1080.32 1240,1119.68 ; 1240,1220.32 1240,1259.68 ; 1240,1360.32 1240,1399.68

## Text inside footprints (layer, text, board x,y; h text height)
C3: Top Overlay "+" at 1473.24,2781.75 h59.06 r270
C4: Top Overlay "+" at 1689.53,2334.97 h59.06 r90